# Altium PCB ESP8266.PcbDoc (part 1 of 2)
Units mm, origin at the board's own origin, x right, y up, seen from the top; angles counter-clockwise.
Board outline 50 x 50 mm, 2 copper layers (Top Layer, Bottom Layer); 50 components, 46 nets, 178 pads, 479 vias.
Unrouted connection lines stored in the file: 2.
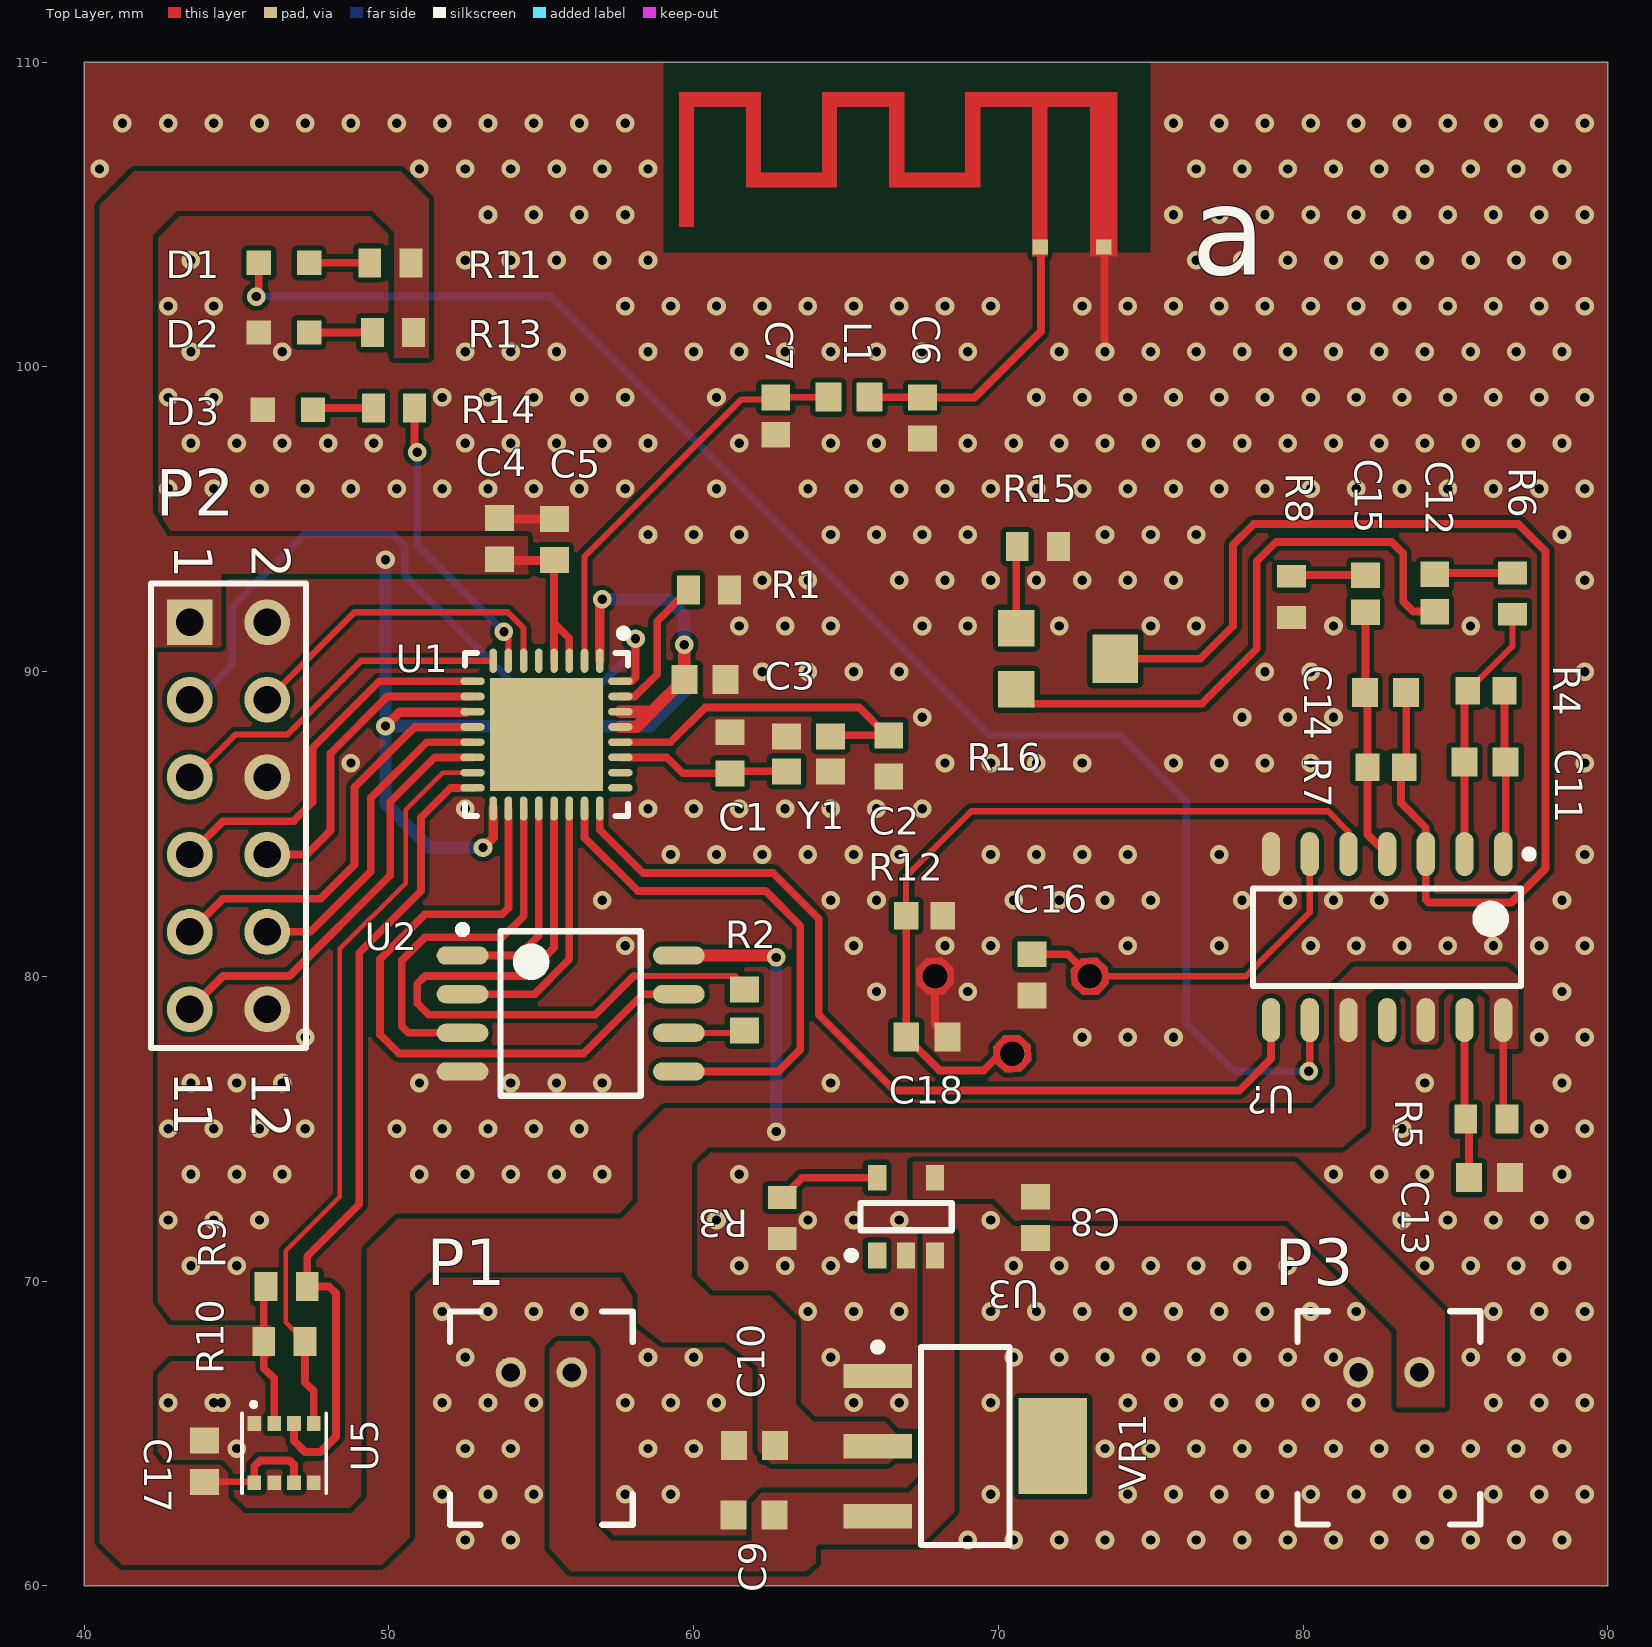
[diagram p0: Top Layer view]
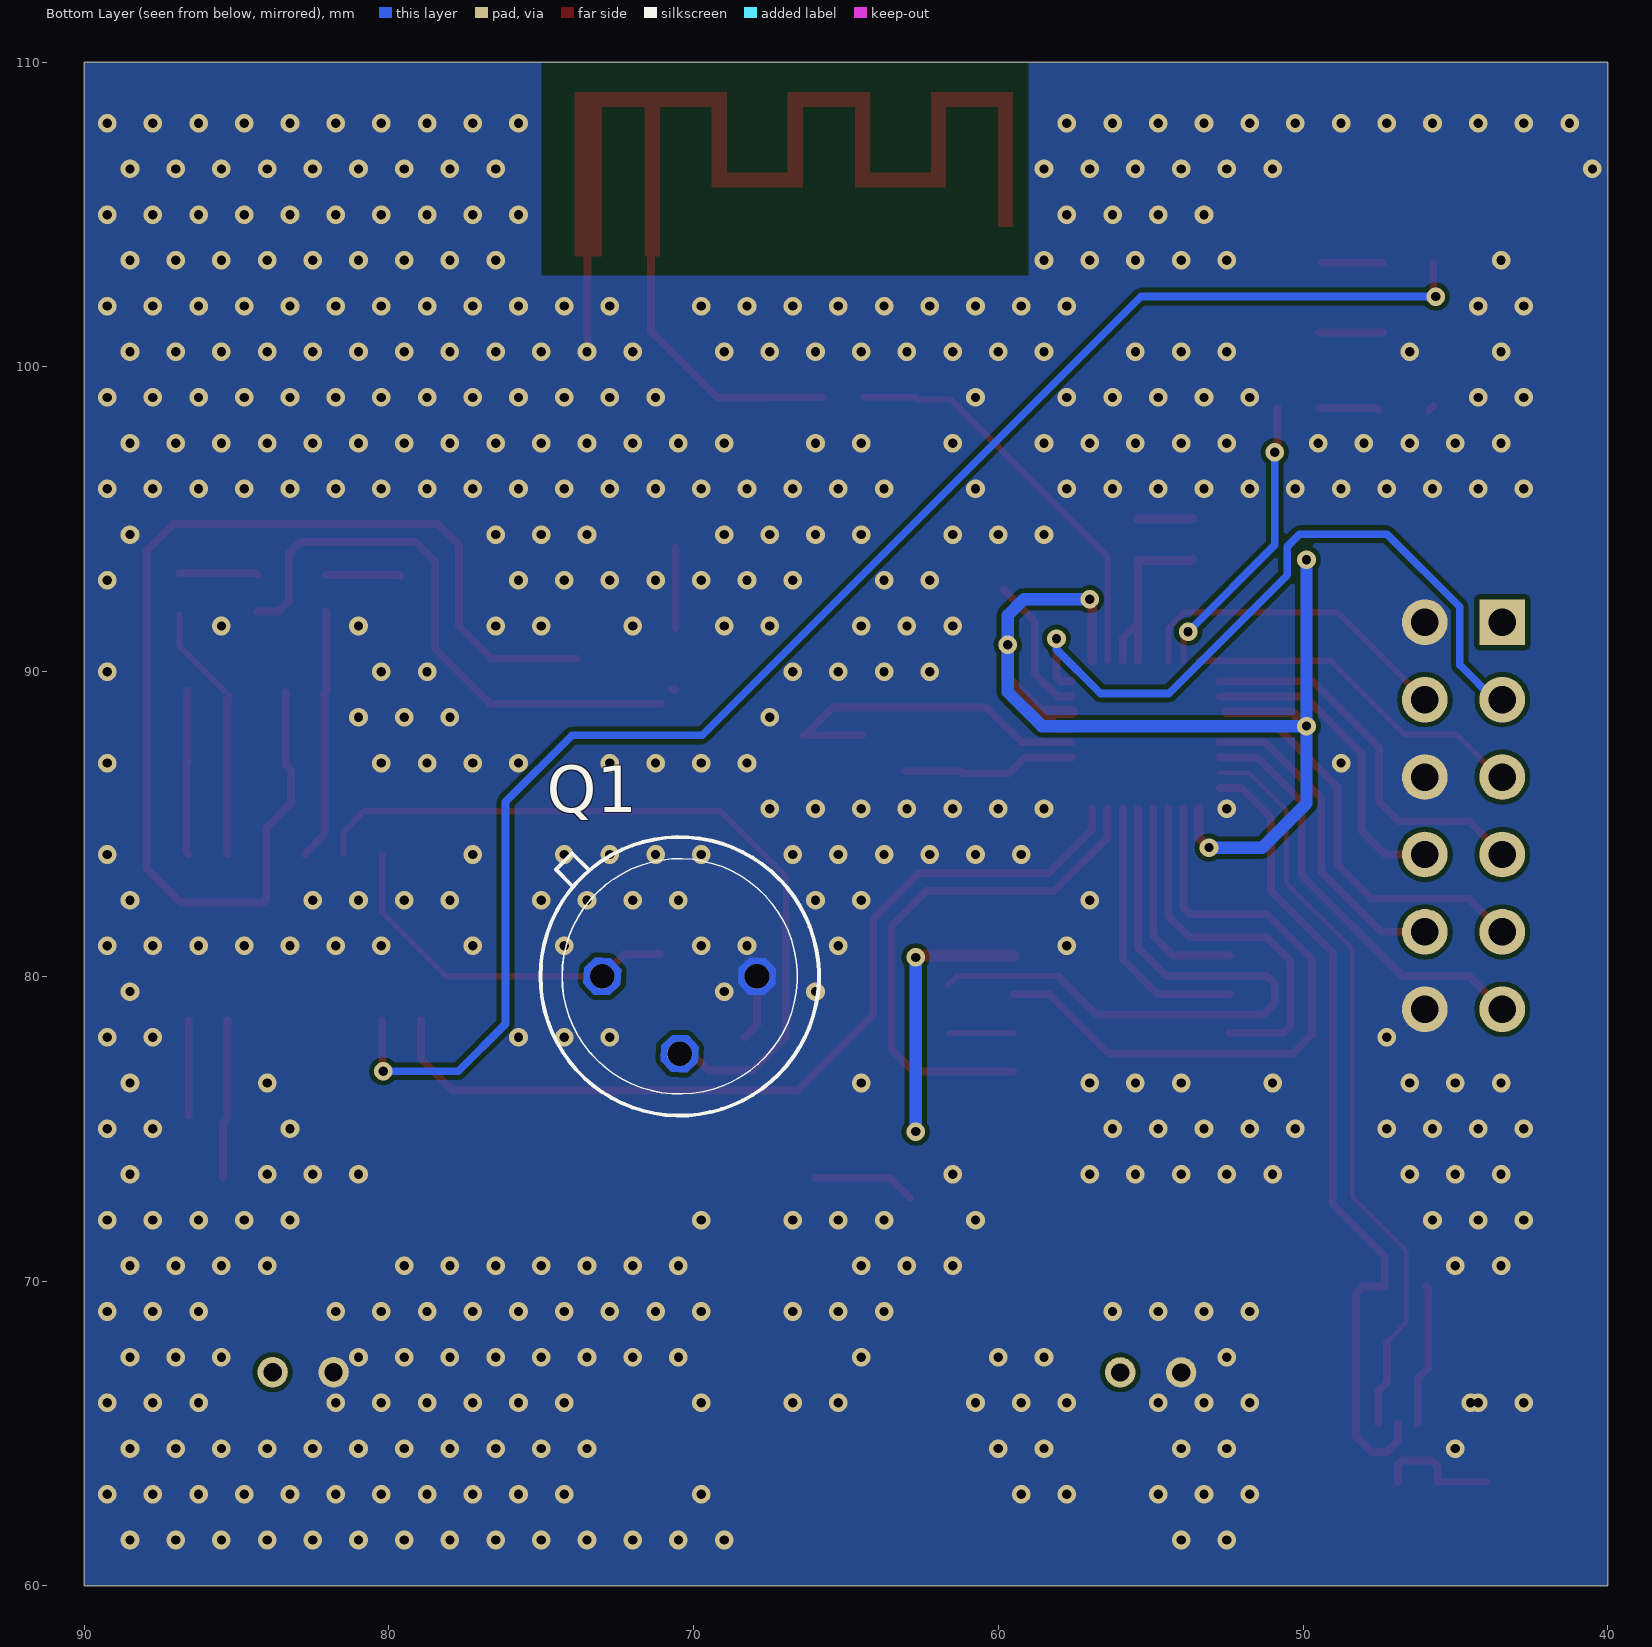
[diagram p1: Bottom Layer view, seen from below]
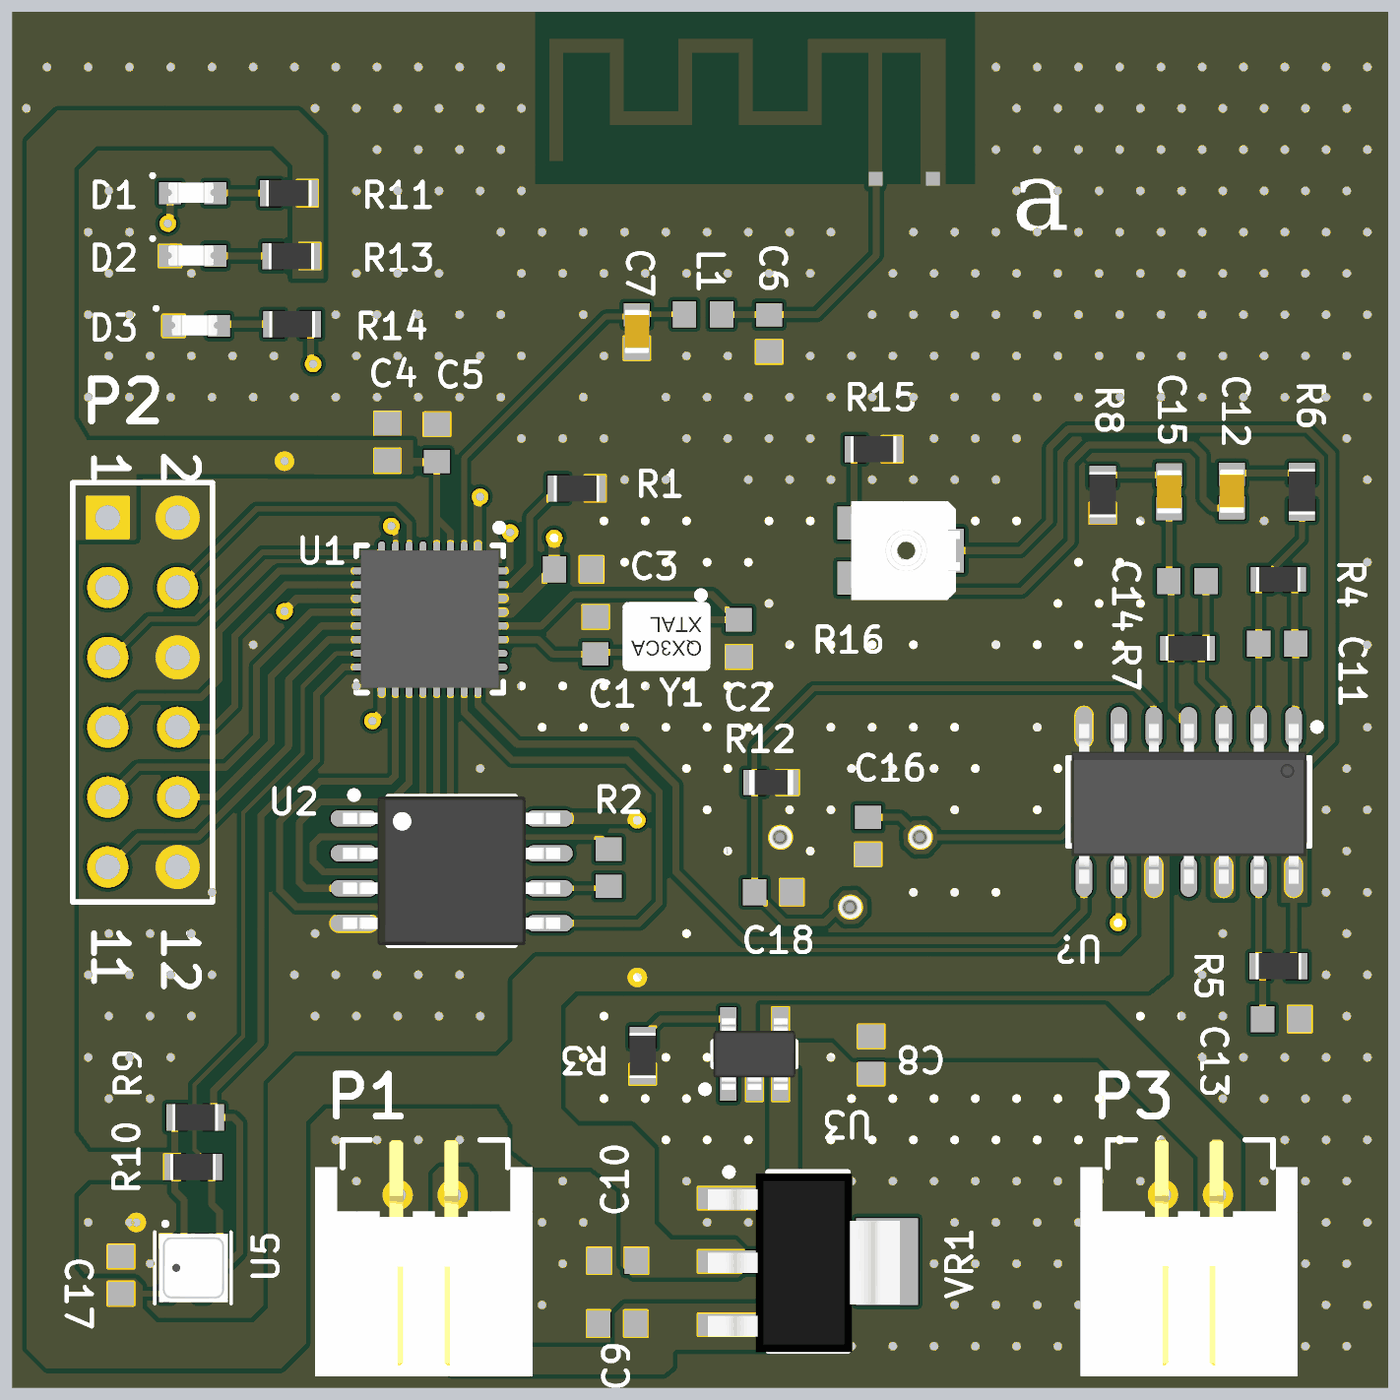
[diagram p2: 3D render of the assembled board from above, using the file's embedded part models]

## Layer stack, top to bottom
Top Solder: solder mask 0.0102, Solder Resist, Dk 3.5
Top Layer: signal copper 0.0356
Dielectric 1: dielectric 0.32, FR-4, Dk 4.8
Bottom Layer: signal copper 0.0356
Bottom Solder: solder mask 0.0102, Solder Resist, Dk 3.5

## Board outline
40,60 90,60 90,110 40,110

## Design rules (kind name [scope] priority, off if disabled: settings)
Clearance [All] p1: gap=0.152 ignorepadtopadclearanceinfootprint=FALSE
HoleSize [All] p1: absolutevalues=TRUE maxlimit=6.3 minlimit=0.3 maxpercent=80.000 minpercent=20.000
MinimumSolderMaskSliver [All] p1: minsoldermaskwidth=0.2
PolygonConnect [All] p1: connectstyle=Direct reliefconductorwidth=0.254 reliefentries=4 polygonreliefangle="90 Angle" airgapwidth=0.254
RoutingVias [All] p1: holewidth=0.305 width=0.152 viastyle="Through Hole" minholewidth=0.305 minwidth=0.61 maxholewidth=6.3 maxwidth=6.3
ShortCircuit [All] p1: allowed=TRUE
SilkToSilkClearance [All] p1: silktosilkclearance=0.2
SilkToSolderMaskClearance [IsPad] p1: minsilkscreentomaskgap=0 clearancetoexposedcopper=TRUE
SolderMaskExpansion [All] p1: expansion=0.051
Width [All] p1: maxlimit=20 minlimit=0.152 preferedwidth=0.203
25 further rules are at their usual default settings.

## Classes and differential pairs
component class MCU: C1 C2 C3 C4 C5 C6 C7 C8 C9 C10 D2 D3 L1 P1 P2 P3 R1 R2 R3 R13 R14 U1 U2 U3 VR1 Y1
component class Sensor: C11 C12 C13 C14 C15 C16 C17 C18 D1 Q1 R4 R5 R6 R7 R8 R9 R10 R11 R12 R15 R16 U5 U?

## Components (designator, comment, footprint, x,y, rotation, side; value= is the part's Value field where it differs from the comment)
C1 "6.8PF" CHIP2PINSM127P600-8N-SAMSUNG-0603 61.196,87.337 r90 top
C2 "6.8PF" CHIP2PINSM127P600-8N-SAMSUNG-0603 66.403,87.236 r270 top
C3 "1UF" CHIP2PINSM127P600-8N-SAMSUNG-0603 60.376,89.742 r0 top
C4 "10UF" CHIP2PINSM127P600-8N-SAMSUNG-0603 53.627,94.365 r90 top
C5 "0.1UF" CHIP2PINSM127P600-8N-SAMSUNG-0603 55.431,94.339 r270 top
C6 "2.4PF" CHIP2PINSM127P600-8N-SAMSUNG-0603 67.504,98.323 r270 top
C7 "3PF" CHIP2PINSM127P600-8N-TDK_0603 62.695,98.389 r270 top
C8 "1UF" CHIP2PINSM127P600-8N-SAMSUNG-0603 71.213,72.09 r270 top
C9 "0.1UF" CHIP2PINSM127P600-8N-SAMSUNG-0603 61.983,62.321 r180 top
C10 "10UF" CHIP2PINSM127P600-8N-SAMSUNG-0603 61.998,64.607 r180 top
C11 "10nF" CHIP2PINSM127P600-8N-SAMSUNG-0603 85.976,87.035 r0 top
C12 "33UF" CHIP2PINSM127P600-8N-TDK_0603 84.328,92.583 r90 top
C13 "0.1UF" CHIP2PINSM127P600-8N-SAMSUNG-0603 86.124,73.392 r0 top
C14 "10nF" CHIP2PINSM127P600-8N-SAMSUNG-0603 82.71,89.321 r180 top
C15 "33UF" CHIP2PINSM127P600-8N-TDK_0603 82.049,92.561 r270 top
C16 "0.1UF" CHIP2PINSM127P600-8N-SAMSUNG-0603 71.102,80.05 r90 top
C17 "0.1UF" CHIP2PINSM127P600-8N-SAMSUNG-0603 43.942,64.084 r270 top
C18 "0.1UF" CHIP2PINSM127P600-8N-SAMSUNG-0603 67.651,78.003 r0 top
D1 "SML-D12M8WT86" LED_0603_ROHM 47.377,103.418 r0 top
D2 "SML-D12M8WT86" LED_0603_ROHM 47.377,101.132 r0 top
D3 "SML-D12M8WT86" LED_0603_ROHM 47.505,98.592 r0 top
L1 "2.2NH" CHIP2PINSM127P600-8N-SAMSUNG-0603 65.1,99.009 r180 top
P1 "Header 2H" "PCBCOMPONENT_1 - DUPLICATE" 55,67 r180 top
P2 "Header 6X2" HDR2X6 43.46,91.62 r270 top
P3 "Header 2H" "PCBCOMPONENT_1 - DUPLICATE" 82.82,67.005 r180 top
P4 "" "PCBComponent_1 - duplicate3" 59.512,103.632 r0 top
Q1 "ZRE200GE" TO5 70.46,80 r270 bottom
R1 "10K" CHIP2PINSM127P600-8N-VISHAY-0603 60.503,92.685 r0 top
R2 "200" CHIP2PINSM127P600-8N-SAMSUNG-0603 61.668,78.892 r270 top
R3 "10K" CHIP2PINSM127P600-8N-VISHAY-0603 62.907,72.065 r270 top
R4 "560K" CHIP2PINSM127P600-8N-STACKPOLE-0603 86.012,89.372 r0 top
R5 "220K" CHIP2PINSM127P600-8N-VISHAY-0603 86.019,75.311 r0 top
R6 "10K" CHIP2PINSM127P600-8N-VISHAY-0603 86.875,92.561 r270 top
R7 "560K" CHIP2PINSM127P600-8N-STACKPOLE-0603 82.718,86.868 r0 top
R8 "10K" CHIP2PINSM127P600-8N-VISHAY-0603 79.629,92.456 r270 top
R9 "4.7K" CHIP2PINSM127P600-8N-VISHAY-0603 46.642,69.816 r180 top
R10 "4.7K" CHIP2PINSM127P600-8N-VISHAY-0603 46.566,68.01 r180 top
R11 "1K" CHIP2PINSM127P600-8N-VISHAY-0603 50.045,103.418 r0 top
R12 "47K" CHIP2PINSM127P600-8N-0603-TE 67.574,81.991 r180 top
R13 "1K" CHIP2PINSM127P600-8N-VISHAY-0603 50.132,101.132 r0 top
R14 "1K" CHIP2PINSM127P600-8N-VISHAY-0603 50.165,98.654 r0 top
R15 "10K" CHIP2PINSM127P600-8N-VISHAY-0603 71.298,94.107 r180 top
R16 "" "PCBCOMPONENT_1 - DUPLICATE1" 72.39,90.424 r270 top value=1M
U1 "ESP8266EX" QFN127P600-8N 55.169,87.935 r270 top
U2 "IC FLASH 32M" SOIC127P600-8N-208 55.964,78.78 r0 top
U3 "IC BATT" SOT23127P600-8N-STC4054 66.971,72.116 r90 top
U5 "BME280" PSON65P250X250X100-8N 46.556,64.348 r90 top
U? "IC PIR DETECTOR" SOIC127P600-8N-PIRIC_NCS36000 82.761,81.287 r270 top (schematic designator U4)
VR1 "LD1117S33TR" SOT230P700X180-4N_ST 68.918,64.581 r0 top
Y1 "FA-128 26.0000MF10Z-W5" PCBCOMPONENT_1 63.773,87.303 r180 top

## Footprints (in the part's own frame and the unit in brackets; to place one, negate y for a bottom-side part, rotate by r counter-clockwise, add the part's x,y. Pads: shape width x height; smd on the part's side, far side on the other; paste and mask are expansions set on the pad)
CHIP2PINSM127P600-8N-0603-TE [mm]
  rect 0.8x0.9 smd: 1(-0.6,0) 2(0.6,0)
  body extent -0.8,-0.45 0.8,0.45, height 0.65
CHIP2PINSM127P600-8N-SAMSUNG-0603 [mm]
  rect 0.85x0.95 smd: 1(-0.675,0) 2(0.675,0)
  body extent -0.85,-0.45 0.85,0.45, height 0.9
CHIP2PINSM127P600-8N-STACKPOLE-0603 [mm]
  rect 0.8x0.9 smd: 1(-0.6,0) 2(0.6,0)
  body extent -0.8,-0.45 0.8,0.45, height 0.5
CHIP2PINSM127P600-8N-TDK_0603 [mm]
  rect 0.84x0.94 smd: 1(-0.61,0) 2(0.61,0)
  body extent -0.8,-0.45 0.8,0.45, height 0.9
CHIP2PINSM127P600-8N-VISHAY-0603 [mm]
  rect 0.75x0.95 smd: 1(-0.675,0) 2(0.675,0)
  body extent -0.82,-0.48 0.82,0.48, height 0.5
HDR2X6 [mm] "Connector; Header; 6x2 Position"
  rect 1.5x1.5 hole 0.9: 1(0,0)
  round 1.5 hole 0.9: 2(0,2.54) 3(2.54,0) 4(2.54,2.54) 5(5.08,0) 6(5.08,2.54) 7(7.62,0) 8(7.62,2.54) 9(10.16,0) 10(10.16,2.54) 11(12.7,0) 12(12.7,2.54)
  silkscreen extent -1.27,-1.27 13.97,3.81
LED_0603_ROHM [mm]
  rect 0.8x0.8 smd: 1(0,0) 2(-1.65,0)
  round 0.25 on Top Overlay: 3(-2.286,0.635)
  body extent -1.71,-0.34 -0.06,0.38, height 0.68
PCBCOMPONENT_1 [mm]
  rect 0.95x0.85 smd: 1(-0.725,-0.575) 2(0.725,-0.575) 3(0.725,0.575) 4(-0.725,0.575)
  round 0.5 on Top Overlay: 5(-1.25,-1.5)
  body extent -1.6,-1.25 1.6,1.25, height 1.1
"PCBCOMPONENT_1 - DUPLICATE" [mm]
  round 1 hole 0.6: 1(-1,0) 2(1,0)
  silkscreen extent -3,-2 3,5, body extent -3.9,-2 4,6.6, height 4.8
"PCBCOMPONENT_1 - DUPLICATE1" [mm]
  rect 1.2x1.2 smd: 1(-1,-1.8) 3(1,-1.8)
  rect 1.6x1.5 smd: 2(0,1.45)
  body extent -1.8,-1.91 1.8,2.05, height 1.13
"PCBComponent_1 - duplicate3" [mm]
  rect 0.5x0.5 smd paste+0 mask+0: 1(11.862,0.305) 2(13.945,0.305)
  Top Layer region: 9.9,4.9 9.4,4.9 9.4,2.26 9.9,2.26
  Top Layer region: 7.4,5.4 4.7,5.4 4.7,4.9 7.4,4.9
  Top Layer region: 7.4,4.9 6.9,4.9 6.9,2.26 7.4,2.26
  Top Layer region: 5.2,4.9 4.7,4.9 4.7,2.26 5.2,2.26
  Top Layer region: 9.4,2.76 7.4,2.76 7.4,2.26 9.4,2.26
  Top Layer region: 2.7,5.4 0,5.4 0,4.9 2.7,4.9
  Top Layer region: 4.7,2.76 2.7,2.76 2.7,2.26 4.7,2.26
  Top Layer region: 2.7,4.9 2.2,4.9 2.2,2.26 2.7,2.26
  Top Layer region: 0.5,4.9 0,4.9 0,0.96 0.5,0.96
  Top Layer region: 14.4,5.4 9.4,5.4 9.4,4.9 14.4,4.9
  Top Layer region: 12.1,4.9 11.6,4.9 11.6,0 12.1,0
  Top Layer region: 14.4,4.9 13.5,4.9 13.5,0 14.4,0
PSON65P250X250X100-8N [mm]
  rect 0.49x0.45 smd: 1(0.97,0.975) 2(0.97,0.325) 3(0.97,-0.325) 4(0.97,-0.975) 5(-0.97,-0.975) 6(-0.97,-0.325) 7(-0.97,0.325) 8(-0.97,0.975)
  silkscreen extent -1.3,-1.39 1.65,1.39, body extent -1.25,-1.27 1.25,1.23, height 0.93
QFN127P600-8N [mm] "ESP8266"
  oval 0.8x0.25 smd: 1(-2.425,1.75) 2(-2.425,1.25) 3(-2.425,0.75) 4(-2.425,0.25) 5(-2.425,-0.25) 6(-2.425,-0.75) 7(-2.425,-1.25) 8(-2.425,-1.75) 17(2.425,-1.75) 18(2.425,-1.25) 19(2.425,-0.75) 20(2.425,-0.25) 21(2.425,0.25) 22(2.425,0.75) 23(2.425,1.25) 24(2.425,1.75)
  oval 0.25x0.8 smd: 9(-1.75,-2.425) 10(-1.25,-2.425) 11(-0.75,-2.425) 12(-0.25,-2.425) 13(0.25,-2.425) 14(0.75,-2.425) 15(1.25,-2.425) 16(1.75,-2.425) 25(1.75,2.425) 26(1.25,2.425) 27(0.75,2.425) 28(0.25,2.425) 29(-0.25,2.425) 30(-0.75,2.425) 31(-1.25,2.425) 32(-1.75,2.425)
  rect 3.7x3.7 smd: 33(0,0)
  silkscreen extent -3.45,-2.68 2.68,2.67, body extent -2.5,-2.5 2.5,2.5, height 0.85
SOIC127P600-8N-208 [mm]
  oval 1.7x0.6 smd: 1(-3.55,1.905) 2(-3.55,0.635) 3(-3.55,-0.635) 4(-3.55,-1.905) 5(3.55,-1.905) 6(3.55,-0.635) 7(3.55,0.635) 8(3.55,1.905)
  silkscreen extent -3.67,-2.7 2.3,2.88, body extent -3.95,-2.7 3.95,2.7, height 1.75
SOIC127P600-8N-PIRIC_NCS36000 [mm]
  oval 1.45x0.6 smd: 1(-2.725,3.81) 2(-2.725,2.54) 3(-2.725,1.27) 4(-2.725,0) 5(-2.725,-1.27) 6(-2.725,-2.54) 7(-2.725,-3.81) 8(2.725,-3.81) 9(2.725,-2.54) 10(2.725,-1.27) 11(2.725,0) 12(2.725,1.27) 13(2.725,2.54) 14(2.725,3.81)
  silkscreen extent -2.85,-4.4 1.6,4.79, body extent -2.83,-4.27 2.97,4.28, height 1.75
SOT230P700X180-4N_ST [mm] "SOT223, 4-Leads, Body 6.40x7.00mm (avg), Pitch 2.30mm, IPC Medium Density"
  rect 2.25x0.8 smd: 1(-2.875,2.3) 2(-2.875,0) 3(-2.875,-2.3)
  rect 2.25x3.15 smd: 4(2.875,0)
  silkscreen extent -3,-3.25 1.45,3.37, body extent -3.64,-3.29 3.34,3.19, height 1.64
SOT23127P600-8N-STC4054 [mm]
  rect 0.85x0.6 smd: 1(-1.275,0.95) 2(-1.275,0) 3(-1.275,-0.95) 4(1.275,-0.95) 5(1.275,0.95)
  silkscreen extent -1.4,-1.5 0.45,1.92, body extent -1.3,-1.5 1.3,1.5, height 1.1
TO5 [mil]
  round 32 hole 32: 1(0,-100) 2(100,0) 3(0,100)
  Top Layer region: 24.43,-91.11 10.99,-76.44 -8.89,-75.57 -23.56,-89.01 -24.43,-108.89 -10.99,-123.56 8.89,-124.43 23.56,-110.99
  Top Layer region: 124.43,8.89 110.99,23.56 91.11,24.43 76.44,10.99 75.57,-8.89 89.01,-23.56 108.89,-24.43 123.56,-10.99
  Top Layer region: 24.43,108.89 10.99,123.56 -8.89,124.43 -23.56,110.99 -24.43,91.11 -10.99,76.44 8.89,75.57 23.56,89.01
  Bottom Layer region: 24.43,-91.11 10.99,-76.44 -8.89,-75.57 -23.56,-89.01 -24.43,-108.89 -10.99,-123.56 8.89,-124.43 23.56,-110.99
  Bottom Layer region: 124.43,8.89 110.99,23.56 91.11,24.43 76.44,10.99 75.57,-8.89 89.01,-23.56 108.89,-24.43 123.56,-10.99
  Bottom Layer region: 24.43,108.89 10.99,123.56 -8.89,124.43 -23.56,110.99 -24.43,91.11 -10.99,76.44 8.89,75.57 23.56,89.01
  Multi-Layer region: 24.43,-91.11 10.99,-76.44 -8.89,-75.57 -23.56,-89.01 -24.43,-108.89 -10.99,-123.56 8.89,-124.43 23.56,-110.99
  Multi-Layer region: 124.43,8.89 110.99,23.56 91.11,24.43 76.44,10.99 75.57,-8.89 89.01,-23.56 108.89,-24.43 123.56,-10.99
  Multi-Layer region: 24.43,108.89 10.99,123.56 -8.89,124.43 -23.56,110.99 -24.43,91.11 -10.99,76.44 8.89,75.57 23.56,89.01
  silkscreen extent -180,-180 180,180, body extent -472,-472 472,473, height 571

## Part data
C1 C2: library part CL10C6R8DB8NNNC, "CAP CER 6.8PF 50V C0G/NP0 0603", Manufacturer="Samsung Electro-Mechanics", Operating Temperature="-55°C ~ 125°C", Package / Case="0603 (1608 Metric)", Ratings=-, Supplier Part Number 1=1276-2334-1-ND, Temperature Coefficient="C0G, NP0", Tolerance=±0.5pF, Voltage - Rated=50V, Applications="General Purpose", Category=Capacitors, ComponentLink1Description=http://www.samsungsem.com/kr/support/product-search/mlcc/CL10C6R8DB8NNNC.jsp, ComponentLink1URL=http://www.samsungsem.com/kr/support/product-search/mlcc/CL10C6R8DB8NNNC.jsp, Features=-, Height - Seated (Max)=-, Lead Spacing=-, Lead Style=-, Manufacturer Part Number=CL10C6R8DB8NNNC, Mounting Type="Surface Mount, MLCC", Notification="Current market demand for these product types have resulted in fluctuating and extending lead times. Lead times may differ.", Packaging="Cut Tape (CT)", Part Status=Active, Pricing 1="1=0.08, 10=0.039, 100=0.0174, 500=0.01244, 1000=0.00978 (EUR)", RoHS="RoHS Compliant", Size / Dimension="0.063\" L x 0.031\" W (1.60mm x 0.80mm)", Stock 1=40000, Supplier 1=Digi-Key, Thickness (Max)="0.035\" (0.90mm)"
C3 C8: library part CL10B105KP8NNNC, "CAP CER 1UF 10V X7R 0603", Manufacturer="Samsung Electro-Mechanics", Operating Temperature="-55°C ~ 125°C", Package / Case="0603 (1608 Metric)", Ratings=-, Supplier Part Number 1=1276-1946-1-ND, Temperature Coefficient=X7R, Tolerance=±10%, Voltage - Rated=10V, Applications="General Purpose", Category=Capacitors, ComponentLink1Description=http://www.samsungsem.com/kr/support/product-search/mlcc/CL10B105KP8NNNC.jsp, ComponentLink1URL=http://www.samsungsem.com/kr/support/product-search/mlcc/CL10B105KP8NNNC.jsp, Features=-, Height - Seated (Max)=-, Lead Spacing=-, Lead Style=-, Manufacturer Part Number=CL10B105KP8NNNC, Mounting Type="Surface Mount, MLCC", Notification="Current market demand for these product types have resulted in fluctuating and extending lead times. Lead times may differ.", Packaging="Cut Tape (CT)", Part Status=Active, Pricing 1="1=0.08, 10=0.044, 100=0.0197, 500=0.01408, 1000=0.01106 (EUR)", RoHS="RoHS Compliant", Size / Dimension="0.063\" L x 0.031\" W (1.60mm x 0.80mm)", Stock 1=40000, Supplier 1=Digi-Key, Thickness (Max)="0.035\" (0.90mm)"
C4 C10: library part CL10A106KQ8NNNC, "CAP CER 10UF 6.3V X5R 0603", Manufacturer="Samsung Electro-Mechanics", Operating Temperature="-55°C ~ 85°C", Package / Case="0603 (1608 Metric)", Ratings=-, Supplier Part Number 1=1276-1038-1-ND, Temperature Coefficient=X5R, Tolerance=±10%, Voltage - Rated=6.3V, Applications="General Purpose", Category=Capacitors, ComponentLink1Description=http://www.samsungsem.com/kr/support/product-search/mlcc/CL10A106KQ8NNNC.jsp, ComponentLink1URL=http://www.samsungsem.com/kr/support/product-search/mlcc/CL10A106KQ8NNNC.jsp, Features=-, Height - Seated (Max)=-, Lead Spacing=-, Lead Style=-, Manufacturer Part Number=CL10A106KQ8NNNC, Mounting Type="Surface Mount, MLCC", Notification="Current market demand for these product types have resulted in fluctuating and extending lead times. Lead times may differ.", Packaging="Cut Tape (CT)", Part Status=Active, Pricing 1="1=0.25, 10=0.177, 100=0.1001, 500=0.07064, 1000=0.0618 (EUR)", RoHS="RoHS Compliant", Size / Dimension="0.063\" L x 0.031\" W (1.60mm x 0.80mm)", Stock 1=40000, Supplier 1=Digi-Key, Thickness (Max)="0.035\" (0.90mm)"
C5 C9 C13 C16 C17 C18: library part CL10F104ZO8NNNC, "CAP CER 0.1UF 16V Y5V 0603", Manufacturer="Samsung Electro-Mechanics", Operating Temperature="-30°C ~ 85°C", Package / Case="0603 (1608 Metric)", Ratings=-, Supplier Part Number 1=1276-1258-1-ND, Temperature Coefficient="Y5V (F)", Tolerance="-20%, +80%", Voltage - Rated=16V, Applications="General Purpose", Category=Capacitors, ComponentLink1Description=http://www.samsungsem.com/kr/support/product-search/mlcc/CL10F104ZO8NNNC.jsp, ComponentLink1URL=http://www.samsungsem.com/kr/support/product-search/mlcc/CL10F104ZO8NNNC.jsp, Features=-, Height - Seated (Max)=-, Lead Spacing=-, Lead Style=-, Manufacturer Part Number=CL10F104ZO8NNNC, Mounting Type="Surface Mount, MLCC", Notification="Current market demand for these product types have resulted in fluctuating and extending lead times. Lead times may differ.", Packaging="Cut Tape (CT)", Part Status=Active, Pricing 1="1=0.08, 10=0.032, 100=0.0144, 500=0.01026, 1000=0.00806 (EUR)", RoHS="RoHS Compliant", Size / Dimension="0.063\" L x 0.031\" W (1.60mm x 0.80mm)", Stock 1=40000, Supplier 1=Digi-Key, Thickness (Max)="0.035\" (0.90mm)"
C6: library part CL10C2R4BB8NNNC, "CAP CER 2.4PF 50V C0G/NP0 0603", Manufacturer="Samsung Electro-Mechanics", Operating Temperature="-55°C ~ 125°C", Package / Case="0603 (1608 Metric)", Ratings=-, Supplier Part Number 1=1276-2254-1-ND, Temperature Coefficient="C0G, NP0", Tolerance=±0.1pF, Voltage - Rated=50V, Applications="General Purpose", Category=Capacitors, ComponentLink1Description=http://www.samsungsem.com/kr/support/product-search/mlcc/CL10C2R4BB8NNNC.jsp, ComponentLink1URL=http://www.samsungsem.com/kr/support/product-search/mlcc/CL10C2R4BB8NNNC.jsp, Features=-, Height - Seated (Max)=-, Lead Spacing=-, Lead Style=-, Manufacturer Part Number=CL10C2R4BB8NNNC, Mounting Type="Surface Mount, MLCC", Notification="Current market demand for these product types have resulted in fluctuating and extending lead times. Lead times may differ.", Packaging="Cut Tape (CT)", Part Status=Active, Pricing 1="1=0.08, 10=0.034, 100=0.0151, 500=0.01074, 1000=0.00844 (EUR)", RoHS="RoHS Compliant", Size / Dimension="0.063\" L x 0.031\" W (1.60mm x 0.80mm)", Stock 1=40000, Supplier 1=Digi-Key, Thickness (Max)="0.035\" (0.90mm)"
C7: library part CL10C030BB8NNNC, "CAP CER 3PF 50V C0G/NP0 0603", Manufacturer="Samsung Electro-Mechanics", Operating Temperature="-55°C ~ 125°C", Package / Case="0603 (1608 Metric)", Ratings=-, Supplier Part Number 1=1276-2125-1-ND, Temperature Coefficient="C0G, NP0", Tolerance=±0.1pF, Voltage - Rated=50V, Applications="General Purpose", Category=Capacitors, ComponentLink1Description=http://www.samsungsem.com/kr/support/product-search/mlcc/CL10C030BB8NNNC.jsp, ComponentLink1URL=http://www.samsungsem.com/kr/support/product-search/mlcc/CL10C030BB8NNNC.jsp, Features=-, Height - Seated (Max)=-, Lead Spacing=-, Lead Style=-, Manufacturer Part Number=CL10C030BB8NNNC, Mounting Type="Surface Mount, MLCC", Notification="Current market demand for these product types have resulted in fluctuating and extending lead times. Lead times may differ.", Packaging="Cut Tape (CT)", Part Status=Active, Pricing 1="1=0.08, 10=0.026, 100=0.0116, 500=0.00826, 1000=0.00649 (EUR)", RoHS="RoHS Compliant", Size / Dimension="0.063\" L x 0.031\" W (1.60mm x 0.80mm)", Stock 1=40000, Supplier 1=Digi-Key, Thickness (Max)="0.035\" (0.90mm)"
C11 C14: library part CL10B103KB8NCNC, "CAP CER 10000PF 50V X7R 0603", Manufacturer="Samsung Electro-Mechanics", Operating Temperature="-55°C ~ 125°C", Package / Case="0603 (1608 Metric)", Ratings=-, Supplier Part Number 1=1276-1921-1-ND, Temperature Coefficient=X7R, Tolerance=±10%, Voltage - Rated=50V, Applications="General Purpose", Category=Capacitors, ComponentLink1Description=http://www.samsungsem.com/kr/support/product-search/mlcc/CL10B103KB8NCNC.jsp, ComponentLink1URL=http://www.samsungsem.com/kr/support/product-search/mlcc/CL10B103KB8NCNC.jsp, Features=-, Height - Seated (Max)=-, Lead Spacing=-, Lead Style=-, Manufacturer Part Number=CL10B103KB8NCNC, Mounting Type="Surface Mount, MLCC", Packaging="Cut Tape (CT)", Part Status=Active, Pricing 1="1=0.09, 10=0.029, 100=0.0129, 500=0.00926, 1000=0.00728 (EUR)", RoHS="RoHS Compliant", Size / Dimension="0.063\" L x 0.031\" W (1.60mm x 0.80mm)", Stock 1=1066876, Supplier 1=Digi-Key, Thickness (Max)="0.035\" (0.90mm)"
C12 C15: library part C2012X5R0J336M125AC, "CAP CER 33UF 6.3V X5R 0805", Manufacturer="TDK Corporation", Operating Temperature="-55°C ~ 85°C", Package / Case="0805 (2012 Metric)", Ratings=-, Supplier Part Number 1=445-5986-6-ND, Temperature Coefficient=X5R, Tolerance=±20%, Voltage - Rated=6.3V, Applications="General Purpose", Category=Capacitors, ComponentLink1Description=https://product.tdk.com/info/en/catalog/datasheets/mlcc_commercial_general_en.pdf, ComponentLink1URL=https://product.tdk.com/info/en/catalog/datasheets/mlcc_commercial_general_en.pdf, Failure Rate=-, Features="Low ESL", Height - Seated (Max)=-, Lead Spacing=-, Lead Style=-, Manufacturer Part Number=C2012X5R0J336M125AC, Mounting Type="Surface Mount, MLCC", Notification="Current market demand for these product types have resulted in fluctuating and extending lead times. Lead times may differ.", Packaging=Digi-Reel®, Part Status=Active, Pricing 1="1=0.86, 10=0.654, 100=0.4676, 500=0.362, 1000=0.31172 (EUR)", RoHS="RoHS Compliant", Size / Dimension="0.079\" L x 0.049\" W (2.00mm x 1.25mm)", Stock 1=20000, Supplier 1=Digi-Key, Thickness (Max)="0.057\" (1.45mm)"
D1 D2 D3: "LED GREEN DIFFUSED 0603 SMD", Base Part Number=SML-D12, Color=Green, Current - Test=20mA, Lens Color=White, Manufacturer="Rohm Semiconductor", Millicandela Rating=25mcd, Package / Case="0603 (1608 Metric)", Voltage - Forward (Vf) (Typ)=2.2V, Category=Optoelectronics, ComponentLink1Description=https://www.rohm.com/datasheet/SML-D12V8W, ComponentLink1URL=https://www.rohm.com/datasheet/SML-D12V8W, Configuration=Standard, Features=-, Height (Max)=0.65mm, Lens Size="1.20mm x 0.80mm", Lens Style="Rectangle with Flat Top", Lens Transparency=Diffused, Manufacturer Part Number=SML-D12M8WT86, Mounting Type="Surface Mount", Packaging="Cut Tape (CT)", Part Status=Active, Pricing 1="1=0.3, 10=0.219, 25=0.1616, 100=0.1154, 250=0.07848, 500=0.06926, 1000=0.05425 (EUR)", RoHS="RoHS Compliant", Size / Dimension="1.60mm L x 0.80mm W", Stock 1=315568, Supplier 1=Digi-Key, Supplier Device Package="0603 (1608 Metric)", Viewing Angle=-, Wavelength - Dominant=572nm, Wavelength - Peak=-
L1: library part L-14C2N2SV4T, "FIXED IND 2.2NH 300MA 150 MOHM", Current - Saturation=-, DC Resistance (DCR)="150 mOhm Max", Frequency - Self Resonant=12GHz, Manufacturer="Johanson Technology Inc.", Operating Temperature="-40°C ~ 100°C", Package / Case="0603 (1608 Metric)", Q @ Freq="8 @ 100MHz", Supplier Part Number 1=712-1427-1-ND, Tolerance=±0.3nH, Category="Inductors, Coils, Chokes", ComponentLink1Description=https://media.digikey.com/pdf/Data%20Sheets/Johanson%20Technology/RF_Ceramic_Chip_Inductors.pdf, ComponentLink1URL=https://media.digikey.com/pdf/Data%20Sheets/Johanson%20Technology/RF_Ceramic_Chip_Inductors.pdf, Height - Seated (Max)="0.037\" (0.95mm)", Manufacturer Part Number=L-14C2N2SV4T, Material - Core=Ceramic, Mounting Type="Surface Mount", Packaging="Cut Tape (CT)", Part Status=Active, Pricing 1="1=0.08, 10=0.052, 100=0.0348, 500=0.02898, 1000=0.02434 (EUR)", Ratings=-, RoHS="RoHS Compliant", Shielding=Unshielded, Size / Dimension="0.063\" L x 0.031\" W (1.60mm x 0.80mm)", Stock 1=17153, Supplier 1=Digi-Key, Supplier Device Package="0603 (1608 Metric)", Type=Multilayer
P1 P3: "Header, 2-Pin, Right Angle", LatestRevisionDate=17-Jul-2002, LatestRevisionNote="Re-released for DXP Platform.", Publisher="Altium Limited"
P2: "Header, 6-Pin, Dual row", LatestRevisionDate=17-Jul-2002, LatestRevisionNote="Re-released for DXP Platform.", Publisher="Altium Limited"
P4: library part SMB, "SMB Straight Connector", LatestRevisionDate=17-Jul-2002, LatestRevisionNote="Re-released for DXP Platform.", Publisher="Altium Limited"
Q1: "Zmotion Pir Sensor Dual Element", Package="TO-5-3 Zilog", Digi-Key_Part_Number=269-4955-ND, Digi-Key_Purchase_URL=https://www.digikey.com/product-detail/en/zilog/ZRE200GE/269-4955-ND/5147335?utm_source=snapeda&utm_medium=aggregator&utm_campaign=symbol, MF=Zilog, MP=ZRE200GE, SnapEDA_Link=https://www.snapeda.com/parts/ZRE200GE/Zilog/view-part/?ref=snap
R1 R3 R6 R8 R15: library part MCT06030C1002FP500, "RES SMD 10K OHM 1% 1/8W 0603", Manufacturer="Vishay Beyschlag", Operating Temperature="-55°C ~ 155°C", Package / Case="0603 (1608 Metric)", Power (Watts)="0.125W, 1/8W", Supplier Device Package=0603, Supplier Part Number 1=MCT0603-10.0K-CFCT-ND, Temperature Coefficient=±50ppm/°C, Tolerance=±1%, Category=Resistors, ComponentLink1Description=http://www.vishay.com/docs/28705/mcx0x0xpro.pdf, ComponentLink1URL=http://www.vishay.com/docs/28705/mcx0x0xpro.pdf, Composition="Thin Film", Failure Rate=-, Features=Anti-Sulfur, Height - Seated (Max)="0.022\" (0.55mm)", Manufacturer Part Number=MCT06030C1002FP500, Packaging="Cut Tape (CT)", Part Status=Active, Pricing 1="1=0.16, 10=0.133, 100=0.0521, 1000=0.02182, 2500=0.02 (EUR)", RoHS="RoHS Compliant", Size / Dimension="0.061\" L x 0.033\" W (1.55mm x 0.85mm)", Stock 1=1201929, Supplier 1=Digi-Key
R2: library part RC1608F201CS, "RES SMD 200 OHM 1% 1/10W 0603", Manufacturer="Samsung Electro-Mechanics", Operating Temperature="-55°C ~ 155°C", Package / Case="0603 (1608 Metric)", Power (Watts)="0.1W, 1/10W", Supplier Device Package=0603, Supplier Part Number 1=1276-4584-1-ND, Temperature Coefficient=±100ppm/°C, Tolerance=±1%, Category=Resistors, ComponentLink1Description=http://www.samsungsem.com/kr/support/product-search/chip-resistor/RC1608F201CS.jsp, ComponentLink1URL=http://www.samsungsem.com/kr/support/product-search/chip-resistor/RC1608F201CS.jsp, Composition="Thick Film", Failure Rate=-, Features="Moisture Resistant", Height - Seated (Max)="0.022\" (0.55mm)", Manufacturer Part Number=RC1608F201CS, Packaging="Cut Tape (CT)", Part Status=Active, Pricing 1="1=0.08, 10=0.028, 100=0.0115, 1000=0.00516, 2500=0.00448 (EUR)", RoHS="RoHS Compliant", Size / Dimension="0.063\" L x 0.032\" W (1.60mm x 0.80mm)", Stock 1=235074, Supplier 1=Digi-Key
R4 R7: library part ERJ-3EKF5603V, "RES SMD 560K OHM 1% 1/10W 0603", Manufacturer="Panasonic Electronic Components", Operating Temperature="-55°C ~ 155°C", Package / Case="0603 (1608 Metric)", Power (Watts)="0.1W, 1/10W", Supplier Device Package=0603, Supplier Part Number 1=P560KHCT-ND, Temperature Coefficient=±100ppm/°C, Tolerance=±1%, Category=Resistors, ComponentLink1Description=https://industrial.panasonic.com/cdbs/www-data/pdf/RDA0000/AOA0000C304.pdf, ComponentLink1URL=https://industrial.panasonic.com/cdbs/www-data/pdf/RDA0000/AOA0000C304.pdf, Composition="Thick Film", Failure Rate=-, Features="Automotive AEC-Q200", Height - Seated (Max)="0.022\" (0.55mm)", Manufacturer Part Number=ERJ-3EKF5603V, Packaging="Cut Tape (CT)", Part Status=Active, Pricing 1="1=0.09, 10=0.057, 100=0.0231, 1000=0.01037, 2500=0.009 (EUR)", RoHS="RoHS Compliant", Size / Dimension="0.063\" L x 0.032\" W (1.60mm x 0.80mm)", Stock 1=221508, Supplier 1=Digi-Key
R5: library part CRCW0603220KFKEAC, "RES SMD 220K OHM 1% 1/10W 0603", Manufacturer="Vishay Dale", Operating Temperature="-55°C ~ 155°C", Package / Case="0603 (1608 Metric)", Power (Watts)="0.1W, 1/10W", Supplier Device Package=0603, Supplier Part Number 1=541-4039-1-ND, Temperature Coefficient=±100ppm/°C, Tolerance=±1%, Category=Resistors, ComponentLink1Description=http://www.vishay.com/docs/28773/crcwce3.pdf, ComponentLink1URL=http://www.vishay.com/docs/28773/crcwce3.pdf, Composition="Thick Film", Failure Rate=-, Features=-, Height - Seated (Max)="0.022\" (0.55mm)", Manufacturer Part Number=CRCW0603220KFKEAC, Packaging="Cut Tape (CT)", Part Status=Active, Pricing 1="1=0.09, 10=0.026, 100=0.0108, 1000=0.00484, 2500=0.0042 (EUR)", RoHS="RoHS Compliant", Stock 1=154470, Supplier 1=Digi-Key
R9 R10: library part CRCW06034K70JNEAC, "RES SMD 4.7K OHM 5% 1/10W 0603", Manufacturer="Vishay Dale", Operating Temperature="-55°C ~ 155°C", Package / Case="0603 (1608 Metric)", Power (Watts)="0.1W, 1/10W", Supplier Device Package=0603, Supplier Part Number 1=541-3993-6-ND, Temperature Coefficient=±200ppm/°C, Tolerance=±5%, Category=Resistors, ComponentLink1Description=http://www.vishay.com/docs/28773/crcwce3.pdf, ComponentLink1URL=http://www.vishay.com/docs/28773/crcwce3.pdf, Composition="Thick Film", Failure Rate=-, Features=-, Height - Seated (Max)="0.022\" (0.55mm)", Manufacturer Part Number=CRCW06034K70JNEAC, Packaging=Digi-Reel®, Part Status=Active, Pricing 1="1=0.09, 10=0.019, 100=0.008, 1000=0.00357, 2500=0.0031 (EUR)", RoHS="RoHS Compliant", Stock 1=819006, Supplier 1=Digi-Key
R11 R13 R14: library part MCT06030C1001FP500, "RES SMD 1K OHM 1% 1/8W 0603", Manufacturer="Vishay Beyschlag", Operating Temperature="-55°C ~ 155°C", Package / Case="0603 (1608 Metric)", Power (Watts)="0.125W, 1/8W", Supplier Device Package=0603, Supplier Part Number 1=MCT0603-1.00K-CFCT-ND, Temperature Coefficient=±50ppm/°C, Tolerance=±1%, Category=Resistors, ComponentLink1Description=http://www.vishay.com/docs/28705/mcx0x0xpro.pdf, ComponentLink1URL=http://www.vishay.com/docs/28705/mcx0x0xpro.pdf, Composition="Thin Film", Failure Rate=-, Features=Anti-Sulfur, Height - Seated (Max)="0.022\" (0.55mm)", Manufacturer Part Number=MCT06030C1001FP500, Packaging="Cut Tape (CT)", Part Status=Active, Pricing 1="1=0.16, 10=0.133, 100=0.0521, 1000=0.02182, 2500=0.02 (EUR)", RoHS="RoHS Compliant", Size / Dimension="0.061\" L x 0.033\" W (1.55mm x 0.85mm)", Stock 1=193422, Supplier 1=Digi-Key
R12: library part CRGCQ0603F47K, "CRGCQ 0603 47K 1%", Manufacturer="TE Connectivity Passive Product", Operating Temperature="-55°C ~ 155°C", Package / Case="0603 (1608 Metric)", Power (Watts)="0.1W, 1/10W", Supplier Device Package=0603, Supplier Part Number 1=A129708CT-ND, Temperature Coefficient=±100ppm/°C, Tolerance=±1%, Category=Resistors, ComponentLink1Description=https://www.te.com/commerce/DocumentDelivery/DDEController?Action=srchrtrv&DocNm=1773204-3&DocType=DS&DocLang=English, ComponentLink1URL=https://www.te.com/commerce/DocumentDelivery/DDEController?Action=srchrtrv&DocNm=1773204-3&DocType=DS&DocLang=English, Composition="Thick Film", Failure Rate=-, Features="Automotive AEC-Q200, Moisture Resistant", Height - Seated (Max)="0.022\" (0.55mm)", Manufacturer Part Number=CRGCQ0603F47K, Packaging="Cut Tape (CT)", Part Status=Active, Pricing 1="1=0.09, 10=0.026, 100=0.0106, 1000=0.00474, 2500=0.00411 (EUR)", RoHS="RoHS Compliant", Size / Dimension="0.063\" L x 0.031\" W (1.60mm x 0.80mm)", Stock 1=50, Supplier 1=Digi-Key
R16: library part "Res Tap", "Tapped Resistor", Manufacturer="Bourns Inc.", Manufacturer Part Number=TC33X-2-105E, Power (Watts)="0.1W, 1/10W", Resistive Material=Cermet, Supplier Part Number 1=TC33X-2-105ECT-ND, Temperature Coefficient=±250ppm/°C, Tolerance=±25%, Adjustment Type="Top Adjustment", Category="Potentiometers, Variable Resistors", ComponentLink1Description=https://www.bourns.com/docs/Product-Datasheets/TC33.pdf, ComponentLink1URL=https://www.bourns.com/docs/Product-Datasheets/TC33.pdf, LatestRevisionDate=17-Jul-2002, LatestRevisionNote="Re-released for DXP Platform.", Mounting Type="Surface Mount", PackageDescription="Variable Resistor, Thru-Hole; 3 Leads", PackageReference=VR3, Packaging="Cut Tape (CT)", Part Status=Active, Pricing 1="1=0.24, 10=0.242, 25=0.2188, 50=0.2088, 100=0.202, 250=0.18852, 500=0.1717, 1000=0.15486 (EUR)", Published=24-Mar-1999, Publisher="Altium Limited", RoHS="RoHS Compliant", Set Position=0.5, Sim Note="Enter the Resistance value and the set point into parameter fields.", Size / Dimension="Rectangular - 0.150\" x 0.142\" Face x 0.047\" H (3.80mm x 3.60mm x 1.20mm)", Stock 1=32075, Supplier 1=Digi-Key, Termination Style="J Lead"
U1: "SMD IC ESP8266EX, QFN32-PIN, 5_5", Current - Receiving="50mA ~ 56mA", Current - Transmitting="120mA ~ 170mA", Frequency=2.4GHz, Manufacturer="Espressif Systems", Package / Case="32-VFQFN Exposed Pad", Power - Output=20dBm, Supplier Part Number 1=1904-1001-1-ND, Voltage - Supply="2.5 V ~ 3.6 V", Category="RF/IF and RFID", ComponentLink1Description=https://espressif.com/sites/default/files/documentation/0a-esp8266ex_datasheet_en.pdf, ComponentLink1URL=https://espressif.com/sites/default/files/documentation/0a-esp8266ex_datasheet_en.pdf, Data Rate (Max)=54Mbps, Manufacturer Part Number=ESP8266EX, Memory Size=-, Modulation=-, Packaging="Cut Tape (CT)", Part Status=Active, Pricing 1="1=2.49, 10=2.222, 25=2, 100=1.8223, 250=1.64452, 500=1.47562 (EUR)", Protocol=802.11b/g/n, RF Family/Standard=WiFi, RoHS="RoHS Compliant", Sensitivity=-91dBm, Serial Interfaces="I²C, I²S, SPI, UART", Stock 1=2122, Supplier 1=Digi-Key, Type="TxRx + MCU"
U2: library part "W25Q32JVSSIQ TR", "IC FLASH 32M SPI 133MHZ 8SOIC", Manufacturer="Winbond Electronics", Operating Temperature="-40°C ~ 85°C (TA)", Package / Case="8-SOIC (0.209\", 5.30mm Width)", Supplier Device Package=8-SOIC, Supplier Part Number 1=W25Q32JVSSIQCT-ND, Voltage - Supply="2.7 V ~ 3.6 V", Category="Integrated Circuits (ICs)", ComponentLink1Description=http://www.winbond.com/resource-files/w25q32jv%20revg%2003272018%20plus.pdf, ComponentLink1URL=http://www.winbond.com/resource-files/w25q32jv%20revg%2003272018%20plus.pdf, Manufacturer Part Number="W25Q32JVSSIQ TR", Memory Format=FLASH, Memory Interface="SPI - Quad I/O", Memory Size="32Mb (4M x 8)", Memory Type=Non-Volatile, Mounting Type="Surface Mount", Packaging="Cut Tape (CT)", Part Status=Active, Pricing 1="1=0.83, 10=0.753, 25=0.7428, 50=0.739, 100=0.6606, 250=0.65488, 500=0.64536, 750=0.63545, 1000=0.62208 (EUR)", RoHS="RoHS Compliant", Stock 1=102739, Supplier 1=Digi-Key, Technology="FLASH - NOR", Write Cycle Time - Word, Page=3ms
U3: library part STC4054GR, "IC BATT CHRGR 800MA TSOT23-5", Base Part Number=STC4054, Battery Pack Voltage=4.2V, Charge Current - Max=800mA, Current - Charging="Constant - Programmable", Manufacturer=STMicroelectronics, Operating Temperature="-40°C ~ 85°C (TA)", Package / Case="SOT-23-5 Thin, TSOT-23-5", Supplier Device Package=TSOT-23-5, Supplier Part Number 1=497-5809-6-ND, Voltage - Supply (Max)=6.5V, Battery Chemistry=Lithium-Ion, Category="Integrated Circuits (ICs)", ComponentLink1Description=http://www.st.com/content/ccc/resource/technical/document/datasheet/df/b9/e6/5b/ec/92/45/ed/CD00132951.pdf/files/CD00132951.pdf/jcr:content/translations/en.CD00132951.pdf, ComponentLink1URL=http://www.st.com/content/ccc/resource/technical/document/datasheet/df/b9/e6/5b/ec/92/45/ed/CD00132951.pdf/files/CD00132951.pdf/jcr:content/translations/en.CD00132951.pdf, Fault Protection=-, Interface=-, Manufacturer Part Number=STC4054GR, Number of Cells=1, Packaging=Digi-Reel®, Part Status=Active, Pricing 1="1=1.35, 10=1.208, 100=0.9707, 500=0.7975, 1000=0.66079 (EUR)", Programmable Features=Current, RoHS="RoHS Compliant", Stock 1=11621, Supplier 1=Digi-Key
U5: "Integrated pressure, humidity and temperature sensor; 8-pin 2.5x2.5x0.93mm LGA", Package="LGA-8 Bosch", Digi-Key_Part_Number=828-1063-1-ND, Digi-Key_Purchase_URL=https://www.digikey.es/product-detail/en/bosch-sensortec/BME280/828-1063-1-ND/6136314?utm_source=snapeda&utm_medium=aggregator&utm_campaign=symbol, MF=Bosch, MP=BME280, SnapEDA_Link=https://www.snapeda.com/parts/BME280/Bosch%20Sensortec/view-part/?ref=snap
U?: library part NCS36000DG, "IC PIR DETECTOR CTLR 14SOIC", Base Part Number=NCS36000, Manufacturer="ON Semiconductor", Operating Temperature="-40°C ~ 85°C", Package / Case="14-SOIC (0.154\", 3.90mm Width)", Supplier Device Package=14-SOIC, Supplier Part Number 1=NCS36000DGOS-ND, Category="Integrated Circuits (ICs)", ComponentLink1Description=http://www.onsemi.com/pub/Collateral/NCS36000-D.PDF, ComponentLink1URL=http://www.onsemi.com/pub/Collateral/NCS36000-D.PDF, Input Type=Digital, Interface=CMOS, Manufacturer Part Number=NCS36000DG, Mounting Type="Surface Mount", Output Type=Digital, Packaging=Tray, Part Status=Active, Pricing 1="1=0.75, 55=0.63655, 110=0.52291, 550=0.43195, 1045=0.34101 (EUR)", RoHS="RoHS Compliant", Stock 1=566, Supplier 1=Digi-Key, Type="Detector Controller"
VR1: "IC REG LINEAR 3.3V 800MA SOT223", Base Part Number=LD1117, Current - Output=800mA, Manufacturer=STMicroelectronics, Operating Temperature="0°C ~ 125°C", Package / Case="TO-261-4, TO-261AA", Supplier Device Package=SOT-223, Supplier Part Number 1=497-1242-1-ND, Voltage - Input (Max)=15V, Voltage - Output (Max)=-, Voltage - Output (Min/Fixed)=3.3V, Voltage Dropout (Max)="1.2V @ 800mA", Category="Integrated Circuits (ICs)", ComponentLink1Description=http://www.st.com/content/ccc/resource/technical/document/datasheet/99/3b/7d/91/91/51/4b/be/CD00000544.pdf/files/CD00000544.pdf/jcr:content/translations/en.CD00000544.pdf, ComponentLink1URL=http://www.st.com/content/ccc/resource/technical/document/datasheet/99/3b/7d/91/91/51/4b/be/CD00000544.pdf/files/CD00000544.pdf/jcr:content/translations/en.CD00000544.pdf, Control Features=-, Manufacturer Part Number=LD1117S33TR, Mounting Type="Surface Mount", Output Configuration=Positive, Output Type=Fixed, Packaging="Cut Tape (CT)", Part Status=Active, Pricing 1="1=0.37, 10=0.316, 100=0.2358, 500=0.18526, 1000=0.14317 (EUR)", Protection Features="Over Current, Over Temperature", PSRR="75dB (120Hz)", RoHS="RoHS Compliant", Stock 1=10, Supplier 1=Digi-Key
Y1: "CRYSTAL 26.0000MHZ 12PF SMD", Frequency Stability=±10ppm, Load Capacitance=12pF, Manufacturer=EPSON, Operating Mode=Fundamental, Operating Temperature="-20°C ~ 75°C", Package / Case="4-SMD, No Lead", Ratings=-, Supplier Part Number 1=SER4186CT-ND, Category="Crystals, Oscillators, Resonators", ComponentLink1Description=https://support.epson.biz/td/api/doc_check.php?dl=brief_FA-128&lang=en, ComponentLink1URL=https://support.epson.biz/td/api/doc_check.php?dl=brief_FA-128&lang=en, Frequency Tolerance=±10ppm, Height - Seated (Max)="0.020\" (0.50mm)", Manufacturer Part Number="FA-128 26.0000MF10Z-W5", Mounting Type="Surface Mount", Packaging="Cut Tape (CT)", Part Status=Active, Pricing 1="1=0.5, 10=0.419, 50=0.3772, 100=0.3353, 500=0.3185, 1000=0.2682 (EUR)", RoHS="RoHS Compliant", Size / Dimension="0.079\" L x 0.063\" W (2.00mm x 1.60mm)", Stock 1=200409, Supplier 1=Digi-Key, Type="MHz Crystal"

## Via types
v1: diameter 0.61, hole 0.305, Top Layer to Bottom Layer, tented both sides, 466 vias
v2: diameter 0.61, hole 0.305, Top Layer to Bottom Layer, 13 vias

## Nets (pads, with @x,y where several pads share a name; then routed paths per layer and width w, separated by ;. In a path a pad name is that pad's centre, name@x,y a point inside that pad or via, vN(x,y) a via of type N, cw(c..) or ccw(c..) an arc to the next point about the centre after c; other vN are vias at no path point)
3v3: C3.1 C4.1 C5.2 C10.1 C17.2 P2.1 R5.2 R9.2 R10.2 R11.2 R13.2 U1.1 U1.3 U1.4 U1.11 U1.17 U1.29 U1.30 U2.8 U5.2 U5.6 U5.8 U?.10 U?.12 U?.14 VR1.2 | length 62.2
  Top Layer w0.203: C17.2@43.952,63.409 U5.8@45.549,63.409
  Top Layer w0.254: U5.8 45.581,63.92 45.771,64.11 46.736,64.11 46.881,63.965 U5.6 ; R9.2 45.891,69.74 45.891,67.139 46.231,66.799 U5.2 ; U1.4 55.419,91.592 ; C5.2@55.419,93.652 55.419,91.592 ; U1.3 55.919,91.092 55.419,91.592 ; R5.2@86.571,75.434 U?.14
  Top Layer w0.305: v2(49.886,88.214) 50.343,88.671 U1.11@52.527,88.671 ; v2(53.086,84.226) 53.419,84.559 U1.17 ; C4.1 53.664,93.652 55.419,93.652 C5.2 ; U1.1 v2@56.919,92.301
  Top Layer w0.406: U1.29 58.122,88.185 58.622,88.685 ; U1.30 58.622,88.685 ; U2.8 62.647,80.685 v2(62.713,80.62) ; v2(59.69,90.881) 59.69,89.752 58.622,88.685
  Bottom Layer w0.406: v2@49.911,93.701 v2(49.886,93.675) v2(49.886,88.214) ; v2(53.086,84.226) 51.333,84.226 49.886,85.674 v2(49.886,88.214) ; v2(59.69,90.881) 59.69,89.332 58.572,88.214 v2(49.886,88.214) ; v2(62.713,74.905) v2(62.713,80.62)
  other v2: 56.998,92.38
ANT: C6.1 L1.1 P4.1 | length 10.2
  Top Layer w0.254: L1.1 67.493,99.009 C6.1 69.23,98.998 71.399,101.168 71.399,104.826
CH_PU: R14.2 U1.7 | length 9.4
  Top Layer w0.203: v2(53.772,91.313) 53.919,91.166 U1.7
  Top Layer w0.254: 50.84,97.293 R14.2
  Bottom Layer w0.254: 50.927,97.206 50.927,94.158 v2(53.772,91.313)
GND: C1.2 C2.2 C3.2 C4.2 C5.1 C6.2 C7.2 C8.2 C9.2 C10.2 C13.2 C16.1 C17.1 C18.2 D2.2 D3.2 P1.2 P2.2 P2.6 P2.12 P3.2 P4.2 Q1.3 R1.2 R3.2 R8.2 R12.1 R15.1 U2.4 U3.2 U5.1 U5.5 U5.7 U?.7 VR1.1 Y1.2 Y1.4 | length 8.3
  Top Layer w0.254: D3.2@45.727,98.72 D3.2 ; Q1.3 67.92,78.409 C18.2 ; v1@73.482,100.686 73.482,104.826
  Top Layer w0.305: C4.2 53.652,95.014 C5.1
  other v1: 52.5,61.5 54,61.5 69,61.5 70.5,61.5 72,61.5 73.5,61.5 75,61.5 76.5,61.5 78,61.5 79.5,61.5 81,61.5 82.5,61.5 84,61.5 85.5,61.5 87,61.5 88.5,61.5 51.75,63 53.25,63 54.75,63 57.75,63 59.25,63 69.75,63 74.25,63 75.75,63 77.25,63 78.75,63 80.25,63 81.75,63 83.25,63 84.75,63 86.25,63 87.75,63 89.25,63 45,64.5 52.5,64.5 54,64.5 58.5,64.5 60,64.5 73.5,64.5 75,64.5 76.5,64.5 78,64.5 79.5,64.5 81,64.5 82.5,64.5 84,64.5 85.5,64.5 87,64.5 88.5,64.5 42.75,66 44.25,66 51.75,66 53.25,66 54.75,66 57.75,66 59.25,66 60.75,66 65.25,66 66.75,66 69.75,66 74.25,66 75.75,66 77.25,66 78.75,66 80.25,66 81.75,66 86.25,66 87.75,66 89.25,66 52.5,67.5 58.5,67.5 60,67.5 64.5,67.5 70.5,67.5 72,67.5 73.5,67.5 75,67.5 76.5,67.5 78,67.5 79.5,67.5 81,67.5 85.5,67.5 87,67.5 88.5,67.5 51.75,69 53.25,69 54.75,69 56.25,69 63.75,69 65.25,69 66.75,69 69.75,69 71.25,69 72.75,69 74.25,69 75.75,69 77.25,69 78.75,69 80.25,69 81.75,69 86.25,69 87.75,69 89.25,69 43.5,70.5 45,70.5 61.5,70.5 63,70.5 64.5,70.5 70.5,70.5 72,70.5 73.5,70.5 75,70.5 76.5,70.5 78,70.5 79.5,70.5 84,70.5 85.5,70.5 87,70.5 88.5,70.5 42.75,72 44.25,72 45.75,72 60.75,72 63.75,72 65.25,72 66.75,72 69.75,72 83.25,72 84.75,72 86.25,72 87.75,72 89.25,72 43.5,73.5 45,73.5 46.5,73.5 51,73.5 52.5,73.5 54,73.5 55.5,73.5 57,73.5 61.5,73.5 81,73.5 82.5,73.5 84,73.5 88.5,73.5 42.75,75 44.25,75 45.75,75 47.25,75 50.25,75 51.75,75 53.25,75 54.75,75 56.25,75 83.25,75 87.75,75 89.25,75 43.5,76.5 45,76.5 46.5,76.5 51,76.5 54,76.5 55.5,76.5 57,76.5 64.5,76.5 84,76.5 88.5,76.5 47.25,78 72.75,78 74.25,78 75.75,78 87.75,78 89.25,78 66,79.5 69,79.5 88.5,79.5 57.75,81 65.25,81 68.25,81 69.75,81 74.25,81 77.25,81 80.25,81 81.75,81 83.25,81 84.75,81 86.25,81 87.75,81 89.25,81 57,82.5 64.5,82.5 66,82.5 70.5,82.5 72,82.5 73.5,82.5 75,82.5 78,82.5 79.5,82.5 81,82.5 82.5,82.5 88.5,82.5 59.25,84 60.75,84 62.25,84 63.75,84 65.25,84 66.75,84 69.75,84 71.25,84 72.75,84 74.25,84 77.25,84 89.25,84 52.5,85.5 58.5,85.5 60,85.5 61.5,85.5 63,85.5 64.5,85.5 66,85.5 67.5,85.5 48.75,87 68.25,87 69.75,87 71.25,87 72.75,87 75.75,87 77.25,87 78.75,87 80.25,87 89.25,87 67.5,88.5 78,88.5 79.5,88.5 81,88.5 62.25,90 63.75,90 65.25,90 66.75,90 78.75,90 80.25,90 89.25,90 61.5,91.5 63,91.5 64.5,91.5 67.5,91.5 69,91.5 72,91.5 75,91.5 76.5,91.5 81,91.5 85.5,91.5 62.25,93 63.75,93 66.75,93 68.25,93 69.75,93 71.25,93 72.75,93 74.25,93 75.75,93 89.25,93 58.5,94.5 60,94.5 61.5,94.5 64.5,94.5 66,94.5 67.5,94.5 69,94.5 73.5,94.5 75,94.5 76.5,94.5 88.5,94.5 42.75,96 44.25,96 45.75,96 47.25,96 48.75,96 50.25,96 51.75,96 53.25,96 54.75,96 56.25,96 57.75,96 60.75,96 63.75,96 65.25,96 66.75,96 68.25,96 69.75,96 71.25,96 72.75,96 74.25,96 75.75,96 77.25,96 78.75,96 80.25,96 81.75,96 83.25,96 84.75,96 86.25,96 87.75,96 89.25,96 43.5,97.5 45,97.5 46.5,97.5 48,97.5 49.5,97.5 52.5,97.5 54,97.5 55.5,97.5 57,97.5 58.5,97.5 61.5,97.5 64.5,97.5 66,97.5 69,97.5 70.5,97.5 72,97.5 73.5,97.5 75,97.5 76.5,97.5 78,97.5 79.5,97.5 81,97.5 82.5,97.5 84,97.5 85.5,97.5 87,97.5 88.5,97.5 42.75,99 44.25,99 51.75,99 53.25,99 54.75,99 56.25,99 57.75,99 60.75,99 71.25,99 72.75,99 74.25,99 75.75,99 77.25,99 78.75,99 80.25,99 81.75,99 83.25,99 84.75,99 86.25,99 87.75,99 89.25,99 43.5,100.5 46.5,100.5 52.5,100.5 54,100.5 55.5,100.5 58.5,100.5 60,100.5 61.5,100.5 63,100.5 64.5,100.5 66,100.5 67.5,100.5 69,100.5 72,100.5 73.5,100.5 75,100.5 76.5,100.5 78,100.5 79.5,100.5 81,100.5 82.5,100.5 84,100.5 85.5,100.5 87,100.5 88.5,100.5 42.75,102 44.25,102 57.75,102 59.25,102 60.75,102 62.25,102 63.75,102 65.25,102 66.75,102 68.25,102 69.75,102 72.75,102 74.25,102 75.75,102 77.25,102 78.75,102 80.25,102 81.75,102 83.25,102 84.75,102 86.25,102 87.75,102 89.25,102 43.5,103.5 52.5,103.5 54,103.5 55.5,103.5 57,103.5 58.5,103.5 76.5,103.5 78,103.5 79.5,103.5 81,103.5 82.5,103.5 84,103.5 85.5,103.5 87,103.5 88.5,103.5 53.25,105 54.75,105 56.25,105 57.75,105 75.75,105 77.25,105 78.75,105 80.25,105 81.75,105 83.25,105 84.75,105 86.25,105 87.75,105 89.25,105 40.5,106.5 51,106.5 52.5,106.5 54,106.5 55.5,106.5 57,106.5 58.5,106.5 76.5,106.5 78,106.5 79.5,106.5 81,106.5 82.5,106.5 84,106.5 85.5,106.5 87,106.5 88.5,106.5 41.25,108 42.75,108 44.25,108 45.75,108 47.25,108 48.75,108 50.25,108 51.75,108 53.25,108 54.75,108 56.25,108 57.75,108 75.75,108 77.25,108 78.75,108 80.25,108 81.75,108 83.25,108 84.75,108 86.25,108 87.75,108 89.25,108
  other v2: 44.5,66
GPIO2: P2.11 U1.14 | length 14.1
  Top Layer w0.254: P2.11 44.55,80.01 46.736,80.01 50.038,83.312 50.038,85.725 51.498,87.185 U1.14
GPIO16: P2.5 U1.8 | length 11.5
  Top Layer w0.203: P2.5 43.563,86.54 44.958,87.935 46.66,87.935 49.085,90.36 U1.8
LED: D1.2 U?.9 | length 52.2
  Top Layer w0.254: v2(45.644,102.311) 45.727,102.395 D1.2 ; v2(80.188,76.886) 80.221,76.919 U?.9
  Bottom Layer w0.254: v2(45.644,102.311) 55.321,102.311 69.723,87.909 73.99,87.909 76.175,85.725 76.175,78.435 77.724,76.886 v2(80.188,76.886)
LNA: C7.1 L1.2 U1.2 | length 13.6
  Top Layer w0.203: U1.2 56.419,93.782 61.57,98.933 62.629,98.933 62.706,99.009 L1.2
MTCK: P2.9 U1.12 | length 13.6
  Top Layer w0.254: P2.9 44.55,82.55 47.752,82.55 48.87,83.668 48.87,86.208 50.847,88.185 U1.12
MTDI: P2.8 U1.10 | length 10.4
  Top Layer w0.254: P2.8 47.297,84 48.082,84.785 48.082,87.325 49.942,89.185 U1.10
MTDO: P2.10 U1.13 | length 10.7
  Top Layer w0.254: P2.10 47.424,81.46 49.403,83.439 49.403,85.852 51.236,87.685 U1.13
MTMS: P2.7 U1.9 | length 12.7
  Top Layer w0.254: P2.7 44.55,85.09 46.863,85.09 47.498,85.725 47.498,87.503 49.68,89.685 U1.9
NetC11_1: C11.1 R4.1 R6.2 U?.2 | length 8.3
  Top Layer w0.203: R4.1 86.875,90.835 R6.2
  Top Layer w0.254: U?.2 C11.1 R4.1@85.301,89.149
NetC11_2: C11.2 R4.2 U?.1 | length 5.4
  Top Layer w0.254: U?.1 86.651,84.092 C11.2 ; C11.2@86.612,87.074 R4.2
NetC12_1: C12.1 R16.3 | length 19
  Top Layer w0.254: R16.3@71.063,88.951 76.683,88.951 78.486,90.754 78.486,93.624 79.121,94.259 82.906,94.259 83.287,93.878 83.287,92.304 83.617,91.973 C12.1
NetC12_2: C12.2 R6.1 | length 2.6
  Top Layer w0.254: C12.2 84.371,93.236 R6.1
NetC13_1: C13.1 R5.1 U?.13 | length 5.2
  Top Layer w0.254: U?.13 85.301,75.354 85.449,75.206 C13.1
NetC14_1: C14.1 R7.2 R16.2 U?.3 | length 39.7
  Top Layer w0.254: R16.2 76.632,90.424 77.699,91.491 77.699,94.158 78.384,94.844 87.071,94.844 87.96,93.955 87.96,83.541 86.843,82.423 84.125,82.423 84.031,82.517 84.031,84.879 83.218,85.692 R7.2@83.218,86.768 ; R7.2@83.385,86.935 C14.1
NetC14_2: C14.2 C15.2 R7.1 U?.4 | length 8.1
  Top Layer w0.254: C14.2@82.049,89.335 C15.2 ; C14.2@82.118,89.267 R7.1 82.118,84.655 U?.4
NetC15_1: C15.1 R8.1 | length 2.4
  Top Layer w0.254: R8.1 79.669,93.171 C15.1
NetD1_1: D1.1 R11.1 | length 2
  Top Layer w0.254: D1.1 R11.1
NetD2_1: D2.1 R13.1 | length 2.1
  Top Layer w0.254: D2.1 R13.1
NetD3_1: D3.1 R14.1 | length 2
  Top Layer w0.254: D3.1 47.567,98.654 R14.1
NetR1_1: R1.1 U1.31 | length 4.7
  Top Layer w0.254: U1.31 58.07,89.185 58.801,89.916 58.801,91.658 R1.1
NetR2_1: R2.1 U1.21 | length 21.6
  Top Layer w0.203: 58.039,80.01 61.366,80.01 R2.1@61.668,79.709
  Top Layer w0.254: 51.308,78.74 50.927,79.121 50.927,79.756 51.181,80.01 54.483,80.01 55.419,80.946 U1.21 ; 51.435,78.74 56.769,78.74 58.039,80.01
NetR3_1: R3.1 U3.5 | length 3.4
  Top Layer w0.254: R3.1 63.558,73.391 U3.5
NetR9_1: R9.1 U1.16 U5.3 | length 27.1
  Top Layer w0.254: U5.3 46.881,64.752 47.244,64.389 47.752,64.389 48.26,64.897 48.26,69.596 48.04,69.816 R9.1 47.317,70.812 49.022,72.517 49.022,80.772 51.054,82.804 51.054,85.217 52.022,86.185 U1.16
NetR10_1: R10.1 U1.15 U5.4 | length 24.9
  Top Layer w0.152: R10.1 46.609,68.642 46.609,70.993 48.387,72.771 48.387,80.899 50.546,83.058 50.546,85.471 51.76,86.685 U1.15
  Top Layer w0.254: R10.1 47.241,66.678 47.531,66.388 U5.4
NetR15_2: R15.2 R16.1 | length 2.7
  Top Layer w0.254: R16.1 R15.2@70.59,94.074
NetU1_24: U1.24 U?.8 | length 29.8
  Top Layer w0.254: U1.24 56.919,84.813 58.344,83.388 62.611,83.388 64.11,81.89 64.11,78.74 66.599,76.251 77.902,76.251 78.951,77.3 U?.8
OP1_P: C18.1 Q1.2 R12.2 U?.5 | length 25.9
  Top Layer w0.203: R12.2 66.974,83.28 69.113,85.42 80.823,85.42 81.491,84.752 U?.5
  Top Layer w0.254: R12.2 66.974,78.006 68.068,76.911 69.52,76.911 70.069,77.46 Q1.2
RST: P2.3 U1.32 | length 22.5
  Top Layer w0.254: U1.32@57.96,89.685 58.09,89.814 v2(58.09,91.084)
  Bottom Layer w0.254: P2.3@43.716,89.08 44.856,90.221 44.856,92.126 47.244,94.513 50.114,94.513 50.521,94.107 50.521,93.167 54.407,89.281 56.642,89.281 58.09,90.729
SCK/CLK: R2.2 U2.6 | length 2.1
  Top Layer w0.203: U2.6 R2.2@61.595,78.145
SCS/CMD: U1.20 U2.1 | length 6.9
  Top Layer w0.254: U2.1 54.269,80.685 54.919,81.335 U1.20
SDI/SD1: U1.23 U2.5 | length 17.6
  Top Layer w0.254: U1.23 56.419,84.551 58.166,82.804 62.357,82.804 63.5,81.661 63.5,77.597 62.778,76.875 U2.5
SDO/SD0: U1.22 U2.2 | length 8.9
  Top Layer w0.254: U2.2 54.777,79.415 55.919,80.557 U1.22
SHD/SD3: U1.18 U2.7 | length 21.5
  Top Layer w0.254: U1.18 53.919,82.24 53.721,82.042 51.181,82.042 49.708,80.569 49.708,78.08 50.317,77.47 56.388,77.47 58.333,79.415 U2.7
SWP/SD3: U1.19 U2.3 | length 12.4
  Top Layer w0.254: U2.3 50.633,78.145 50.419,78.359 50.419,80.518 51.181,81.28 53.721,81.28 54.419,81.978 U1.19
TOUT: P2.4 U1.6 | length 10.9
  Top Layer w0.203: P2.4 48.868,91.948 53.899,91.948 54.419,91.428 U1.6
URXD: U1.25
UTXD: U1.26
VBAT: C9.1 P1.1 U3.3 VR1.3
VIN: C8.1 P3.1 U3.4
VREF: C16.2 Q1.1 U?.6 | length 12.2
  Top Layer w0.203: Q1.1 78.12,80 80.221,82.1 U?.6
  Top Layer w0.254: C16.2 72.275,80.725 Q1.1
XTAL_IN: C2.1 U1.28 Y1.1 | length 11.5
  Top Layer w0.254: U1.28 59.237,87.685 60.376,88.824 65.43,88.824 C2.1@66.343,87.911 ; Y1.1@64.471,87.911 C2.1@66.343,87.911 ; C2.1 C2.1@66.343,87.911
XTAL_OUT: C1.1 U1.27 Y1.3 | length 5.6
  Top Layer w0.254: U1.27 59.119,87.185 59.642,86.662 C1.1 ; C1.1@61.261,86.728 Y1.3
pads on no net: D1.3 D2.3 D3.3 U1.5 U1.33 U3.1 U?.11 VR1.4 Y1.5
copper on no net: | length 5.7
  Top Layer w0.254: v2@50.84,97.293 v2(50.927,97.206) ; 57.594,89.685 57.96,89.685 ; 70.59,89.424 70.723,89.424 ; 82.049,89.335 82.118,89.267 ; 82.049,91.951 82.071,91.973 ; 83.218,86.768 83.385,86.935 ; 85.242,89.205 85.245,89.205 85.301,89.149
  Top Layer w0.305: 56.919,92.301 56.998,92.38
  Bottom Layer w0.254: 43.46,89.08 43.716,89.08 ; 58.09,90.729 58.09,91.084
  Bottom Layer w0.406: 56.998,92.38 58.369,92.38 59.157,92.38 59.69,91.846 59.69,90.881

## Polygon pours and split planes (outlines as drawn)
GND on Bottom Layer "Top Layer-No Net 1" (solid, pour order 56): 40,60 90,60 90,110 40,110